# Altium PCB PI_CAN_Interface_v2.PcbDoc
Units mil, origin at the board's own origin, x right, y up, seen from the top; angles counter-clockwise.
Board outline 6000 x 4000 mil, 2 copper layers (Top Layer, Bottom Layer); 24 components, 25 nets, 102 pads, 0 vias.
Unrouted connection lines stored in the file: 48.
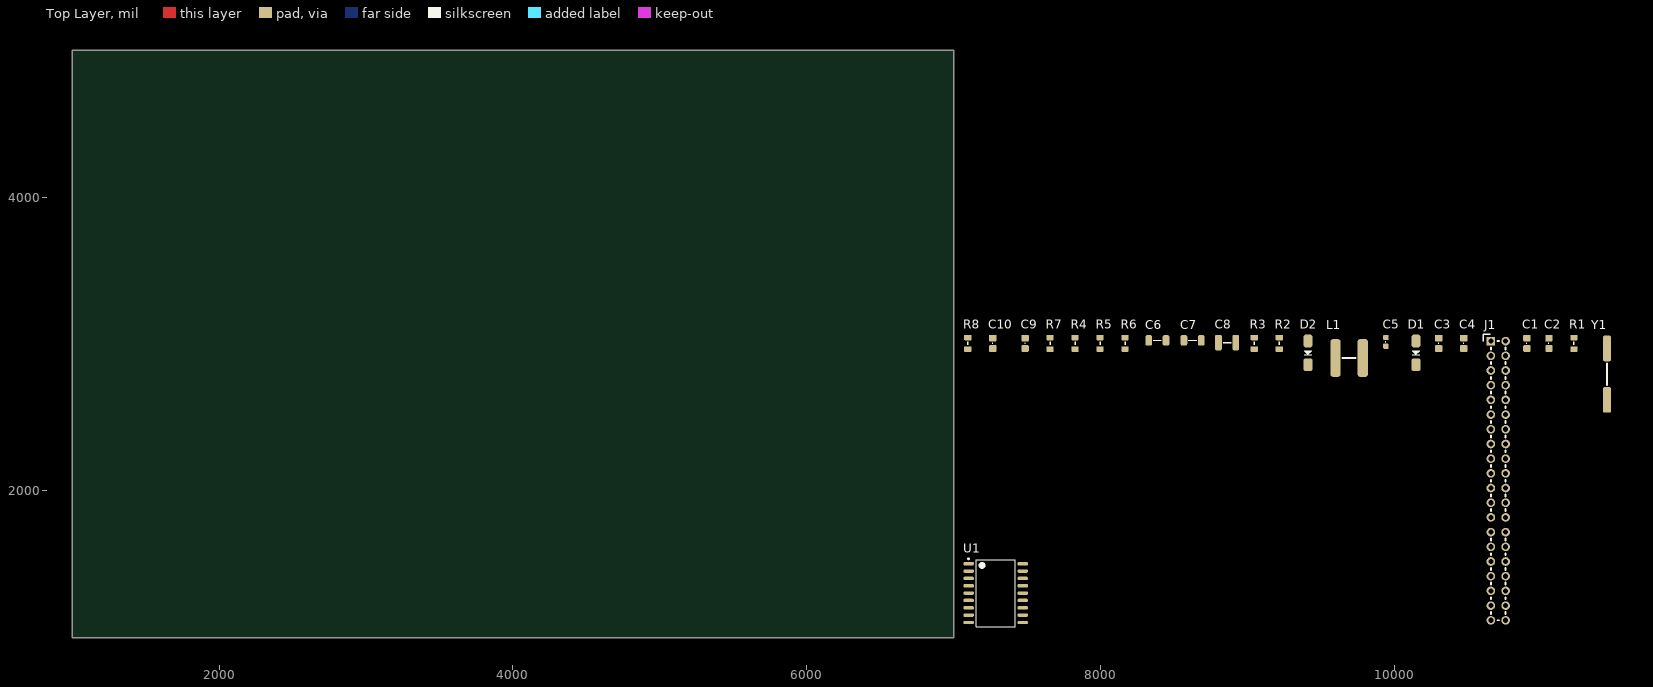
[diagram p0: Top Layer view]
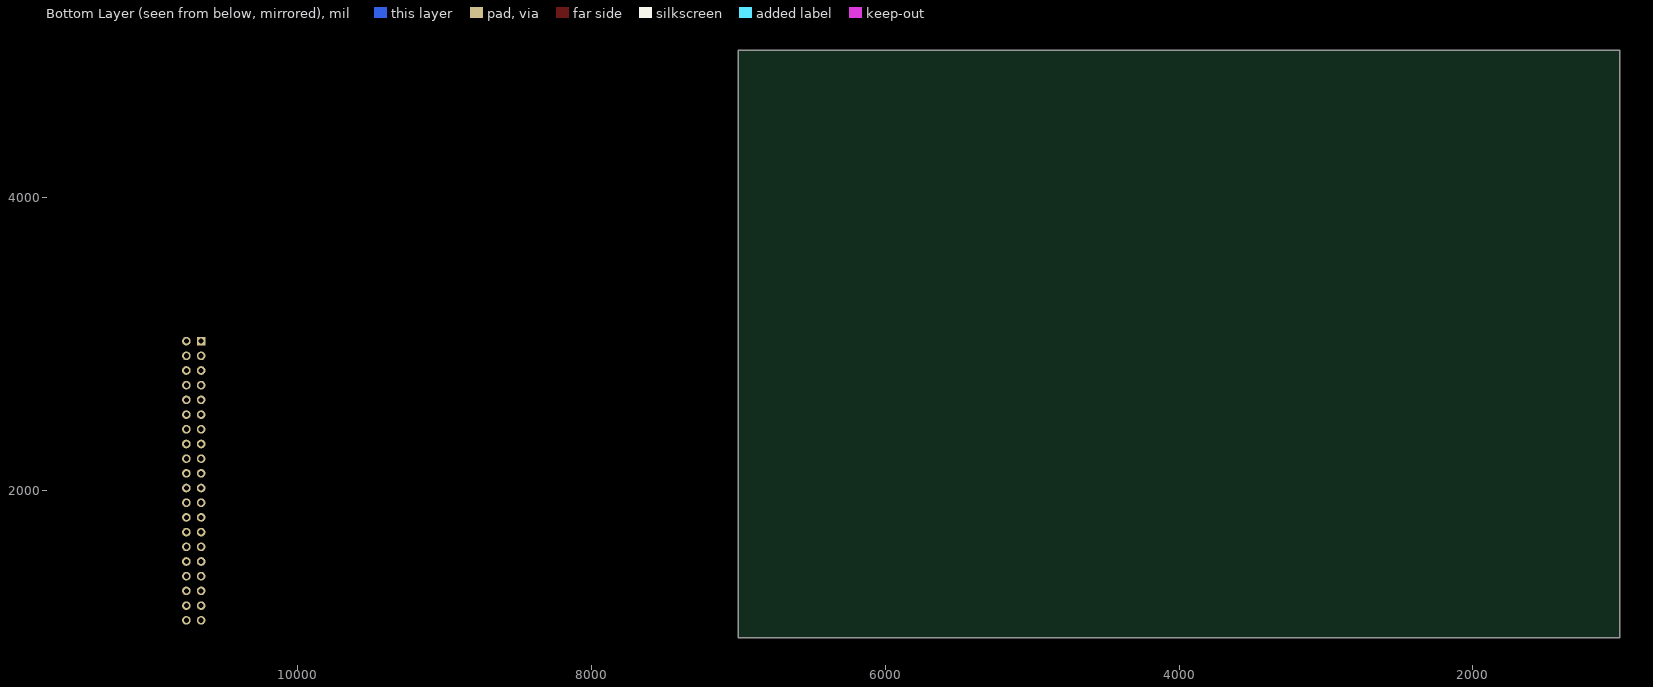
[diagram p1: Bottom Layer view, seen from below]

## Layer stack, top to bottom
Top Solder: solder mask 0.4, Solder Resist, Dk 3.5
Top Layer: signal copper 1.4
Dielectric 1: dielectric 12.6, FR-4, Dk 4.8
Bottom Layer: signal copper 1.4
Bottom Solder: solder mask 0.4, Solder Resist, Dk 3.5

## Board outline
1000,1000 7000,1000 7000,5000 1000,5000

## Design rules (kind name [scope] priority, off if disabled: settings)
Clearance [All] p1: gap=10
PolygonConnect [All] p1: connectstyle=Relief reliefconductorwidth=10 reliefentries=4 polygonreliefangle="90 Angle" airgapwidth=10
RoutingVias [All] p1: holewidth=28 width=50 viastyle="Through Hole" minholewidth=28 minwidth=50 maxholewidth=28 maxwidth=50
SolderMaskExpansion [All] p1: expansion=4
Width [All] p1: maxlimit=10 minlimit=10 preferedwidth=10
30 further rules are at their usual default settings.

## Components (designator, comment, footprint, x,y, rotation, side; value= is the part's Value field where it differs from the comment)
C1 "20pF" CAPC2013X100N-0805-NoOverlay 10900,3005 r0 top
C2 "20pF" CAPC2013X100N-0805-NoOverlay 11050,3005 r0 top
C3 "100n" CAPC2013X100N-0805-NoOverlay 10300,3005 r0 top
C4 "100n" CAPC2013X100N-0805-NoOverlay 10470,3005 r0 top
C5 "0.10µF" CAPC1608X55N-0603-NoOverlay 9940,3015 r0 top
C6 "2.2µF" CAPC3216X140N-1206-NoOverlay 8385,3025 r0 top
C7 "2.2µF" CAPC3216X140N-1206-NoOverlay 8625,3025 r0 top
C8 "100µF" CAPC3225X100N-1210-NoOverlay 8860,3010 r0 top
C9 "47pF" CAPC2013X100N-0805-NoOverlay 7485,3005 r0 top
C10 "5600pF" CAPC2013X100N-0805-NoOverlay 7265,3005 r0 top
D1 "B340A-E3/61T" DIOM5127X229N-NoOverlay 10145,2940 r90 top
D2 "B340A-E3/61T" DIOM5127X229N-NoOverlay 9410,2940 r90 top
J1 "HM 2x20" HM2X20-NoOverlay 10705,2070 r0 top
L1 "10uH" XAL7030-NOOVERLAY 9690,2905 r0 top
R1 "4.7k" RESC2013X38N-0805-NOOVERLAY 11220,3005 r0 top
R2 "330 kOhm" RESC2013X38N-0805-NOOVERLAY 9215,3005 r0 top
R3 "51.1k" RESC2013X38N-0805-NOOVERLAY 9045,3005 r0 top
R4 "56k" RESC2013X38N-0805-NOOVERLAY 7825,3005 r0 top
R5 "160k" RESC2013X38N-0805-NOOVERLAY 7995,3005 r0 top
R6 "15k" RESC2013X38N-0805-NOOVERLAY 8165,3005 r0 top
R7 "9.1k" RESC2013X38N-0805-NOOVERLAY 7655,3005 r0 top
R8 "560" RESC2013X38N-0805-NOOVERLAY 7095,3005 r0 top
U1 "MCP2515-I/SO" MCP2515_Test 7285,1305 r0 top
Y1 "16MHz" "CRYSTAL SMD-NoOverlay" 11445,2795 r90 top

## Footprints (in the part's own frame and the unit in brackets; to place one, negate y for a bottom-side part, rotate by r counter-clockwise, add the part's x,y. Pads: shape width x height; smd on the part's side, far side on the other; paste and mask are expansions set on the pad)
CAPC1608X55N-0603-NoOverlay [mm] "Capacitor,non-polarized,Chip;1.60mm L X 0.80mm W X 0.55mm H"
  rrect30% 0.9x0.9 smd: 1(0,0.75) 2(0,-0.75)
  silkscreen extent 0,-0.08 0,0.08, body extent -0.4,-0.8 0.4,0.8, height 0.79
CAPC2013X100N-0805-NoOverlay [mm] "Capacitor,non-polarized,Chip;2.00mm L X 1.25mm W X 1.00mm H"
  rrect30% 1.27x1.15 smd: 1(0,0.9) 2(0,-0.9)
  silkscreen extent 0,-0.1 0,0.1, body extent -0.62,-1 0.63,1, height 0.6
CAPC3216X140N-1206-NoOverlay [mm] "Capacitor,non-polarized,Chip;3.20mm L X 1.60mm W X 1.40mm H"
  rrect50% 1.15x1.8 smd: 1(-1.5,0) 2(1.5,0)
  silkscreen extent -0.71,0 0.71,0, body extent -1.6,-0.8 1.6,0.8, height 0.78
CAPC3225X100N-1210-NoOverlay [mm] "Capacitor,non-polarized,Chip;3.20mm L X 2.50mm W X 1.00mm H"
  rrect50% 1.15x2.7 smd: 1(-1.5,0) 2(1.5,0)
  silkscreen extent -0.69,0 0.69,0, body extent -1.6,-1.25 1.6,1.25, height 0.78
"CRYSTAL SMD-NoOverlay" [mm]
  rrect50% 4.445x1.4 smd: 1(-4.445,0) 2(4.445,0)
  silkscreen extent -1.85,0 1.85,0, body extent -6.15,-2.35 6.15,2.35, height 4.3
DIOM5127X229N-NoOverlay [mm] "Diode,Molded Body;5.105mm L X 2.665mm W X 2.29mm H"
  rrect50% 2.2x1.55 smd: 1(-2.05,0) 2(2.05,0)
  silkscreen extent -0.36,-0.64 0.38,0.64, body extent -2.75,-1.4 2.75,1.4, height 2.6
HM2X20-NoOverlay [mm] "Double row pin header 2x20, 2.54mm"
  rect 1.5x1.5 hole 0.9: 1(-1.27,24.13)
  round 1.5 hole 0.9: 2(1.27,24.13) 3(-1.27,21.59) 4(1.27,21.59) 5(-1.27,19.05) 6(1.27,19.05) 7(-1.27,16.51) 8(1.27,16.51) 9(-1.27,13.97) 10(1.27,13.97) 11(-1.27,11.43) 12(1.27,11.43) 13(-1.27,8.89) 14(1.27,8.89) 15(-1.27,6.35) 16(1.27,6.35) 17(-1.27,3.81) 18(1.27,3.81) 19(-1.27,1.27) 20(1.27,1.27) 21(-1.27,-1.27) 22(1.27,-1.27) 23(-1.27,-3.81) 24(1.27,-3.81) 25(-1.27,-6.35) 26(1.27,-6.35) 27(-1.27,-8.89) 28(1.27,-8.89) 29(-1.27,-11.43) 30(1.27,-11.43) 31(-1.27,-13.97) 32(1.27,-13.97) 33(-1.27,-16.51) 34(1.27,-16.51) 35(-1.27,-19.05) 36(1.27,-19.05) 37(-1.27,-21.59) 38(1.27,-21.59) 39(-1.27,-24.13) 40(1.27,-24.13)
  silkscreen extent -2.57,-24.13 1.27,25.31, body extent -2.5,-25.4 2.5,25.4, height 8.4
MCP2515_Test [mm]
  oval 1.85x0.6 smd: 1(-4.675,5.08) 2(-4.675,3.81) 3(-4.675,2.54) 4(-4.675,1.27) 5(-4.675,0) 6(-4.675,-1.27) 7(-4.675,-2.54) 8(-4.675,-3.81) 9(-4.675,-5.08) 10(4.675,-5.08) 11(4.675,-3.81) 12(4.675,-2.54) 13(4.675,-1.27) 14(4.675,0) 15(4.675,1.27) 16(4.675,2.54) 17(4.675,3.81) 18(4.675,5.08)
  silkscreen extent -4.8,-5.8 3.35,6.05, body extent -3.75,-5.8 3.75,5.8, height 2.65
RESC2013X38N-0805-NOOVERLAY [mm] "Resistor,Chip;2.03mm L X 1.27mm W X 0.6mm H"
  rrect30% 1.27x0.95 smd: 1(0,1) 2(0,-1)
  silkscreen extent 0,-0.29 0,0.29, body extent -0.62,-1 0.63,1, height 0.5
XAL7030-NOOVERLAY [mm] "(8 x 8 x 3.1) mm"
  rrect50% 1.78x6.5 smd: 1(-2.36,0) 2(2.36,0)
  silkscreen extent -1.17,0 1.17,0, body extent -4,-4 4,4, height 3

## Part data
C1 C2: library part 2911010043650, "CAP CER 20PF 100V NP0 0805"
C3 C4: library part 0100000001868
C5: library part 0100000012857, "CAP CER 0.1UF 50V X7R 0603"
C6 C7: library part 2911010048624, "CAP CER 2.2UF 50V X7R 1206"
C8: library part 2911010013301, "CAP CER 100UF 10V X5R 1210"
C9: library part 0100000101735, "CAP CER 47PF 200V NP0 0805"
C10: library part 3500000162328, "CAP CER 5600PF 50V X7R 0805"
D1 D2: library part 0100000007488, "DIODE SCHOTTKY 40V 3A DO214AC"
J1: library part 0100000087640
L1: library part 2911010049126, "FIXED IND 10uH 5.3A"
R1: library part 0100000002056, "RES SMD 4.7K OHM 1% 1/8W 0805"
R2: library part 2911010011383, "RES SMD 330K OHM 5% 1/8W 0805"
R3: library part 2911010049379, "RES SMD 51.1K OHM 1% 1/8W 0805"
R4: library part 2911010012533, "RES SMD 56K OHM 1% 1/8W 0805"
R5: library part 2911010044480, "RES SMD 160K OHM 1% 1/8W 0805"
R6: library part 2911010029241, "RES SMD 15K OHM 1% 1/8W 0805"
R7: library part 2911010016340, "RES SMD 9.1K OHM 1% 1/8W 0805"
R8: library part 0100000008218, "RES SMD 560 OHM 1% 1/8W 0805"
U1: library part 00000002, "SPI to CAN Interface"
Y1: library part 0100000008898, "CRYSTAL 16.0000MHZ 20PF SMD"

## Nets (pads, with @x,y where several pads share a name; then routed paths per layer and width w, separated by ;. In a path a pad name is that pad's centre, name@x,y a point inside that pad or via, vN(x,y) a via of type N, cw(c..) or ccw(c..) an arc to the next point about the centre after c; other vN are vias at no path point)
E\X\T\_\I\N\T\: J1.22 U1.12
GND: C1.1 C2.1 C3.1 C4.1 C6.1 C7.1 C8.1 C9.1 C10.1 D1.2 J1.6 J1.9 J1.14 J1.20 J1.25 J1.30 J1.34 J1.39 L1.1 R1.1 R4.1 R5.1 R8.1 U1.18
Net*_22: D2.2
NetC1_2: C1.2 U1.8 Y1.2
NetC2_2: C2.2 U1.7 Y1.1
NetC5_1: C5.1
NetC5_2: C5.2 D1.1
NetC6_2: C6.2 C7.2 D2.1 R2.2
NetC9_2: C9.2 R6.2
NetC10_2: C10.2 R6.1
NetR1_2: R1.2 U1.17
NetR2_1: R2.1 R4.2
NetR3_1: R3.1 R7.2
NetR5_2: R5.2
NetR7_1: R7.1 R8.2
NetU1_1: U1.1
NetU1_2: U1.2
RXD: J1.10
S\P\I\_\C\S\0\: J1.24 U1.16
SPI_CLK: J1.23 U1.13
SPI_MISO: J1.21 U1.15
SPI_MOSI: J1.19 U1.14
TXD: J1.8
VCC-3V3: C3.2 C4.2 U1.9
VCC-5V: C8.2 J1.2 J1.4 L1.2 R3.2
pads on no net: J1.1 J1.3 J1.5 J1.7 J1.11 J1.12 J1.13 J1.15 J1.16 J1.17 J1.18 J1.26 J1.27 J1.28 J1.29 J1.31 J1.32 J1.33 J1.35 J1.36 J1.37 J1.38 J1.40 U1.3 U1.4 U1.5 U1.6 U1.10 U1.11